# Altium PCB AGC_Calib_Board.PcbDoc (part 1 of 2)
Units mil, origin at the board's own origin, x right, y up, seen from the top; angles counter-clockwise.
Board outline 3200 x 2800 mil, 6 copper layers (Top Layer, InternalPlane1, MidLayer1, MidLayer2, MidLayer3, Bottom Layer), stack 62.3 mil thick; 76 components, 86 nets, 398 pads, 234 vias.
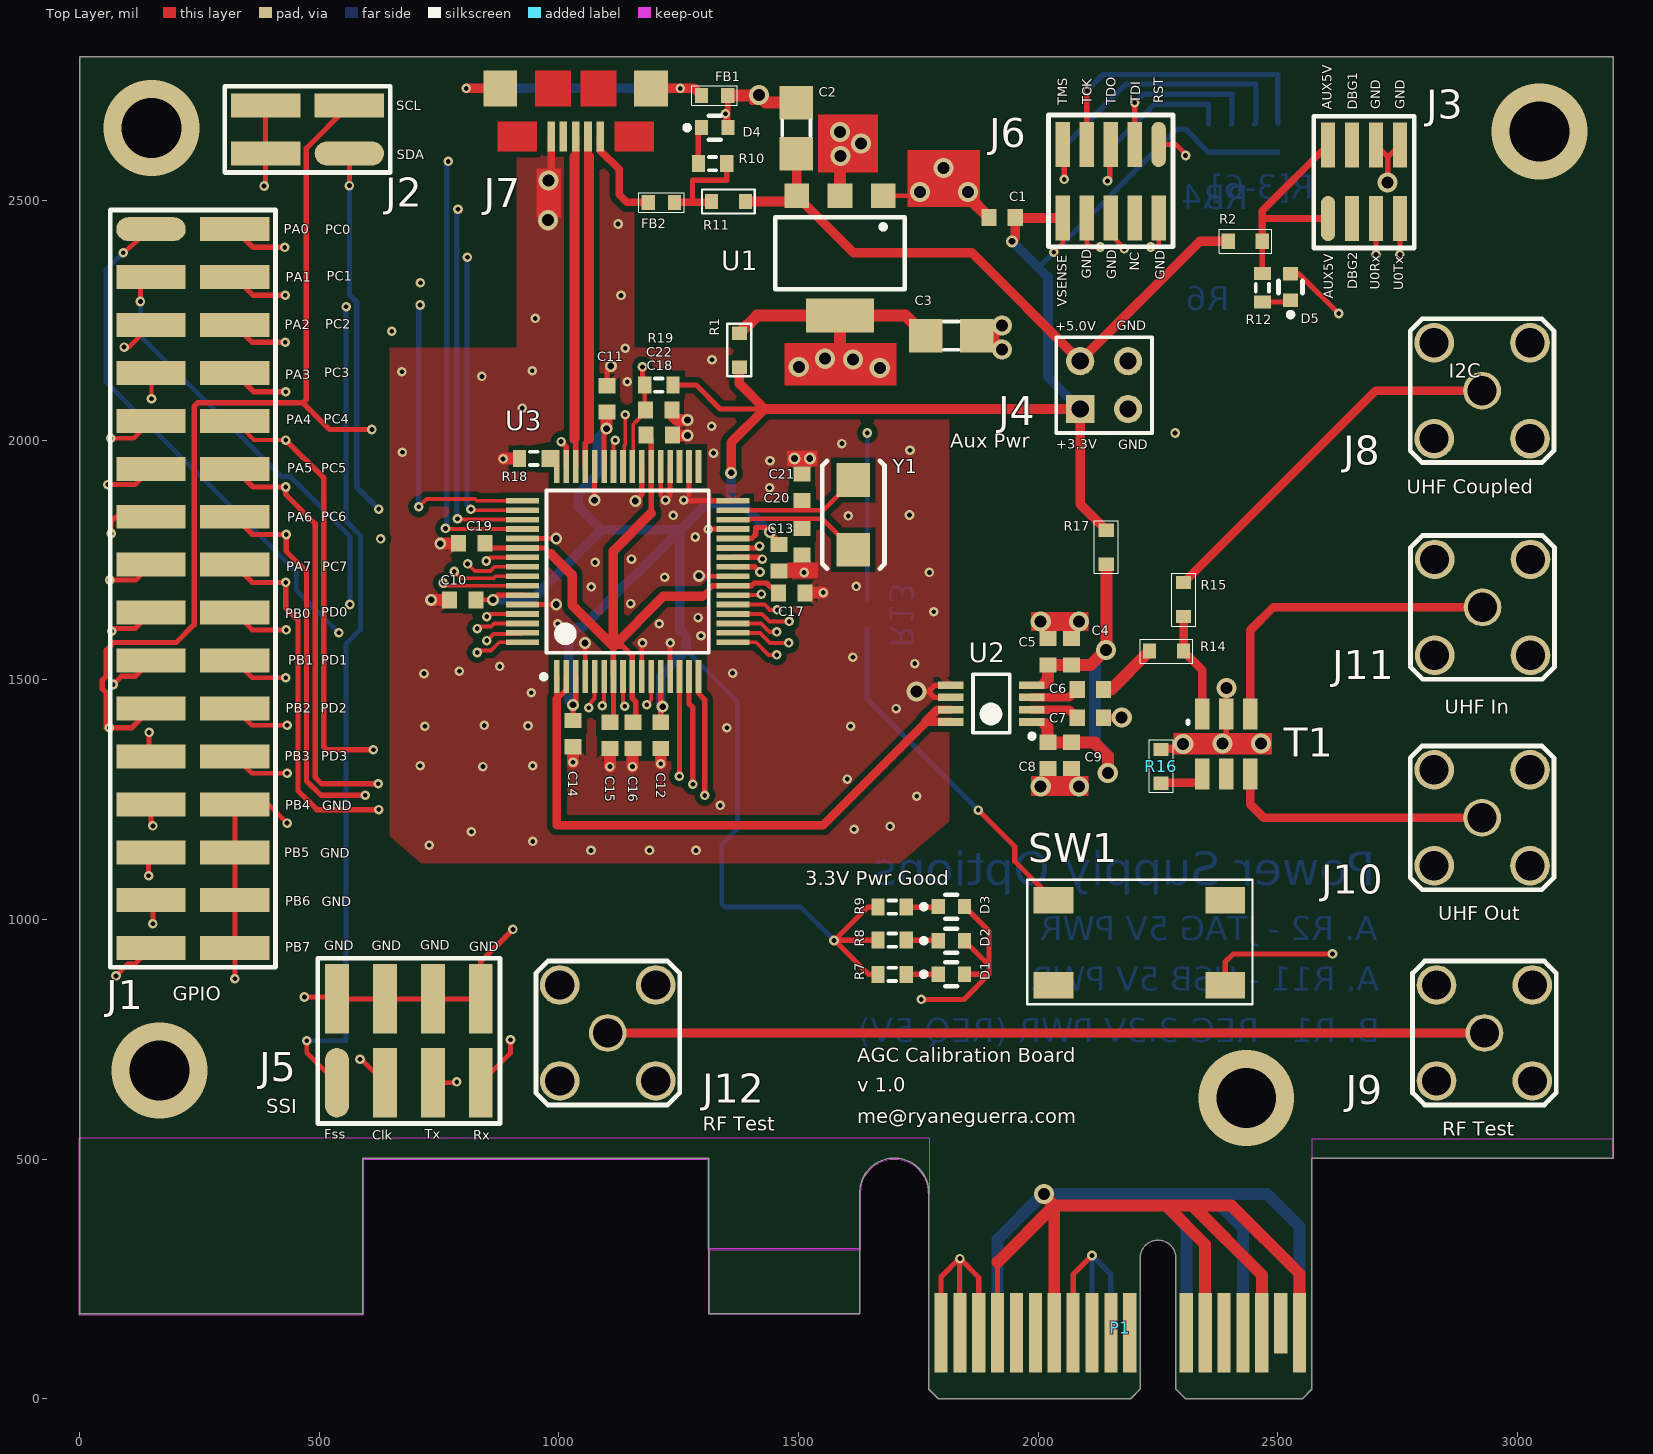
[diagram p0: Top Layer view]
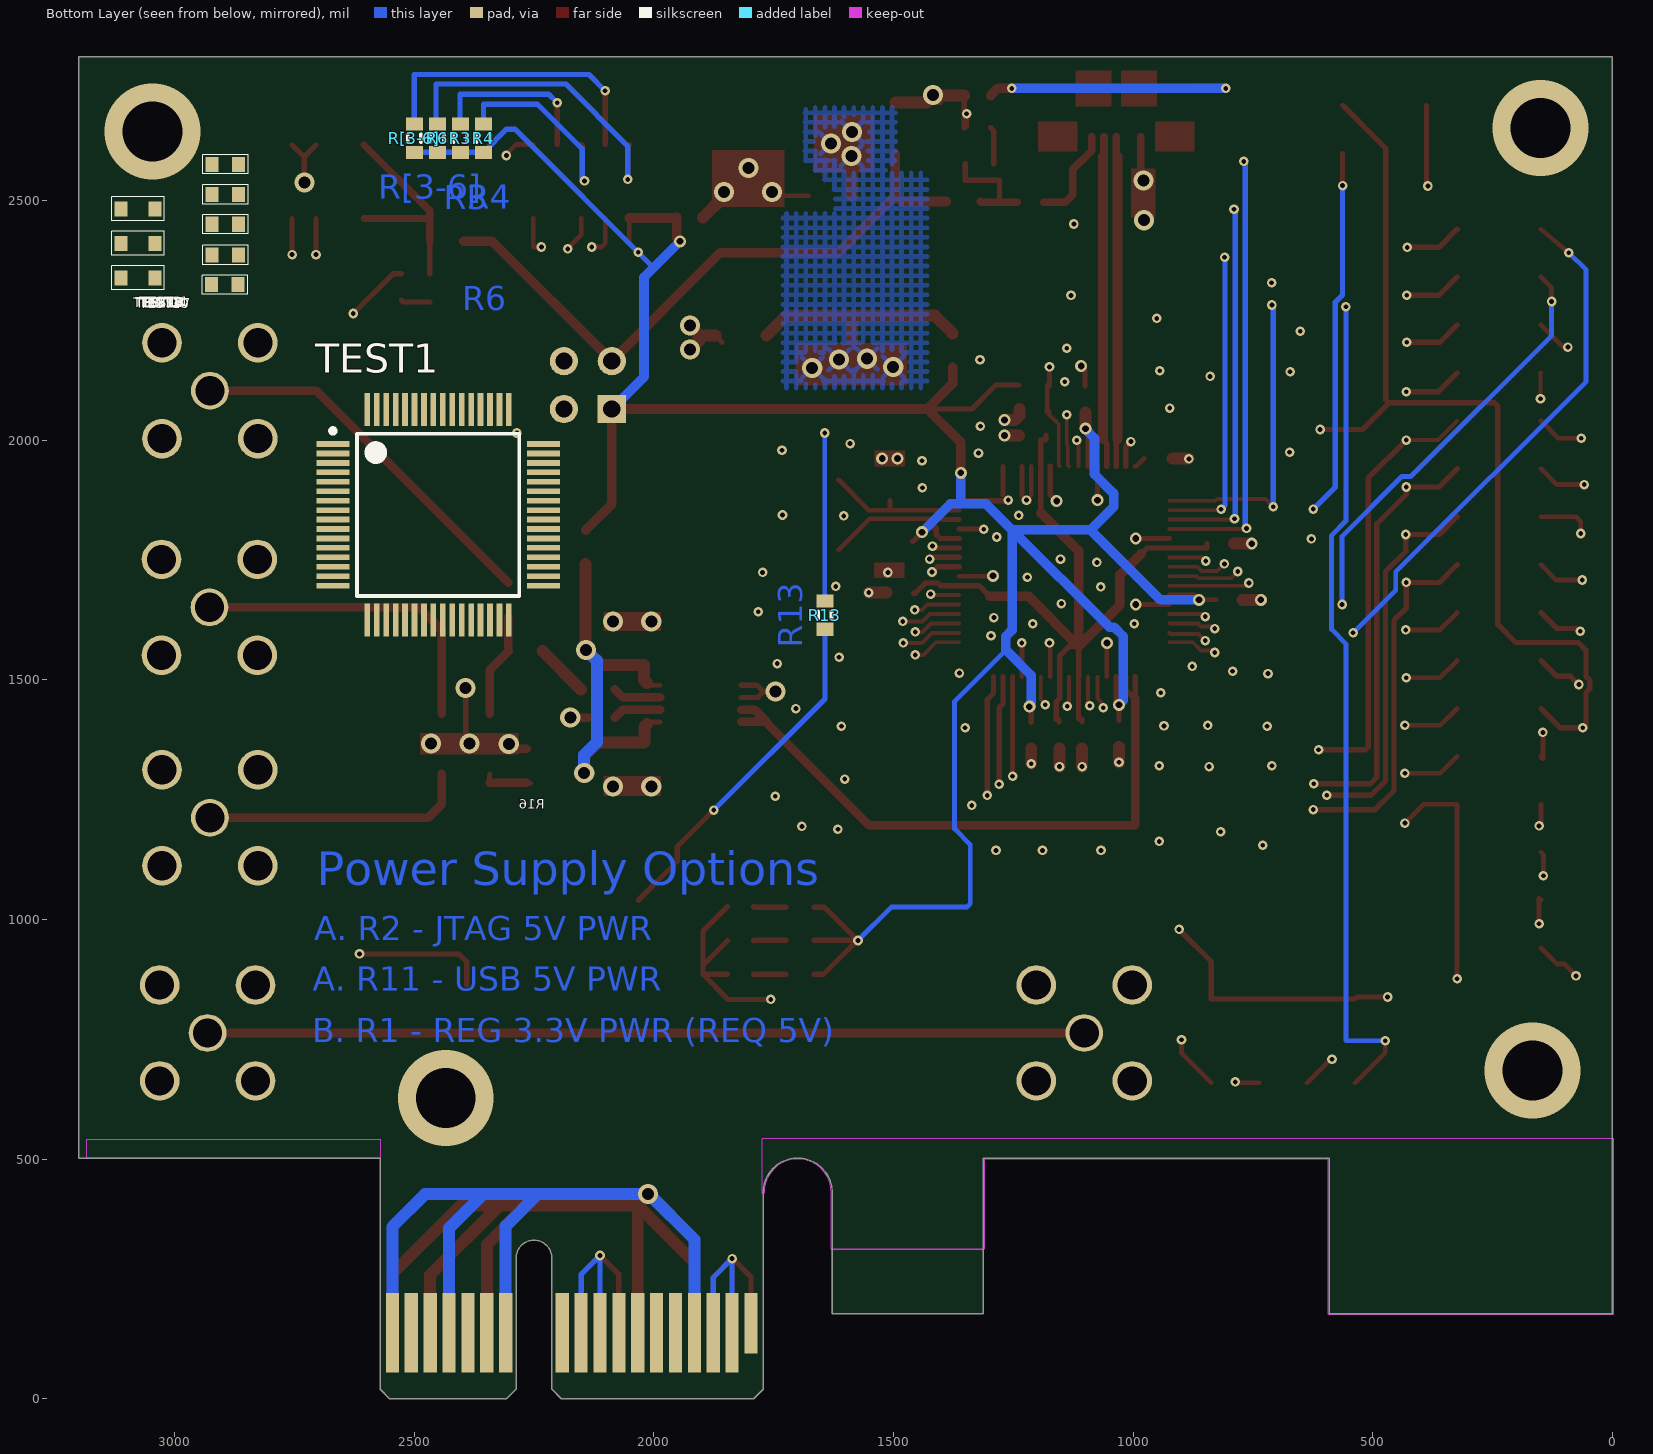
[diagram p1: Bottom Layer view, seen from below]
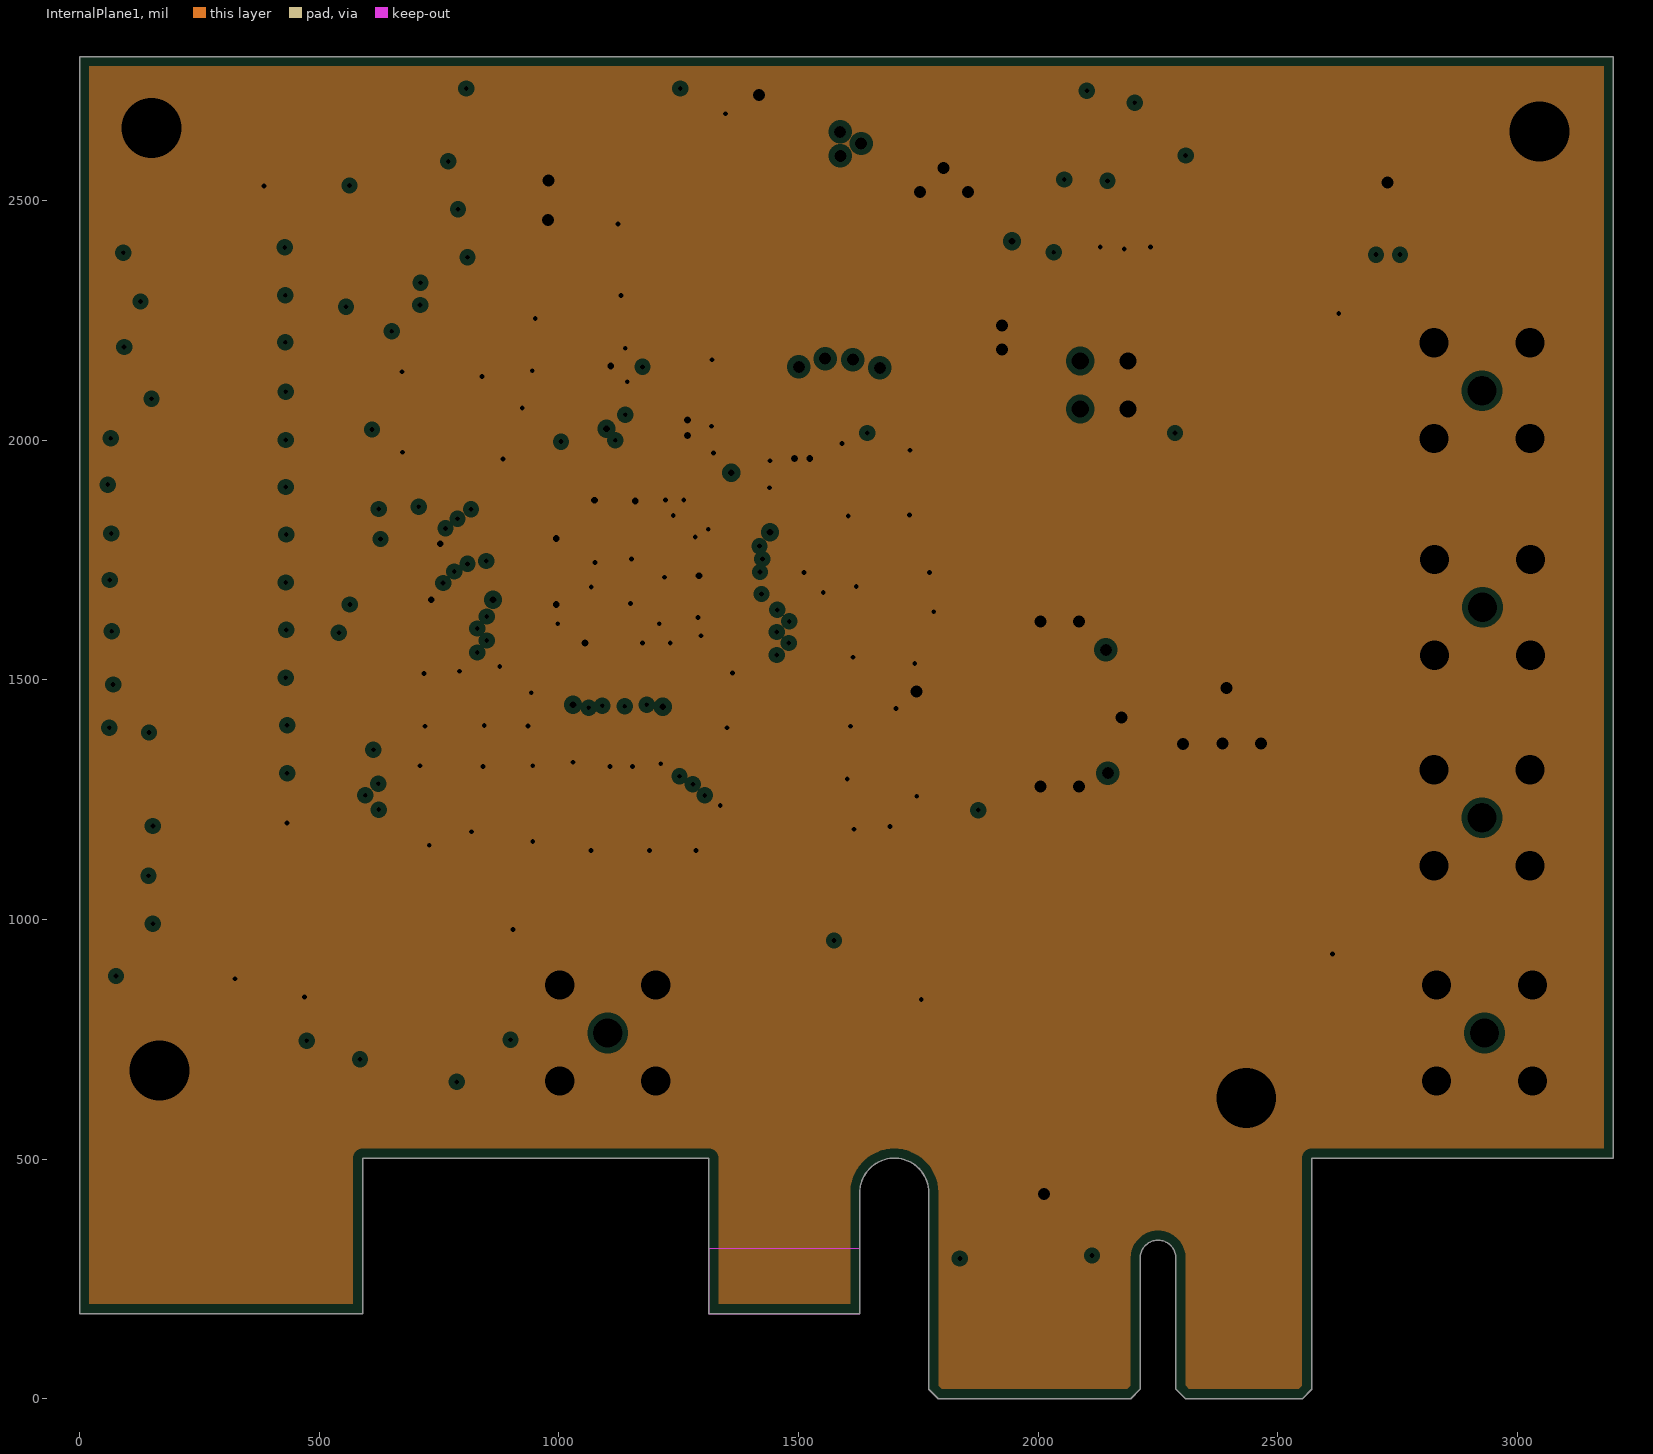
[diagram p2: InternalPlane1, clearances drawn from the general rule]
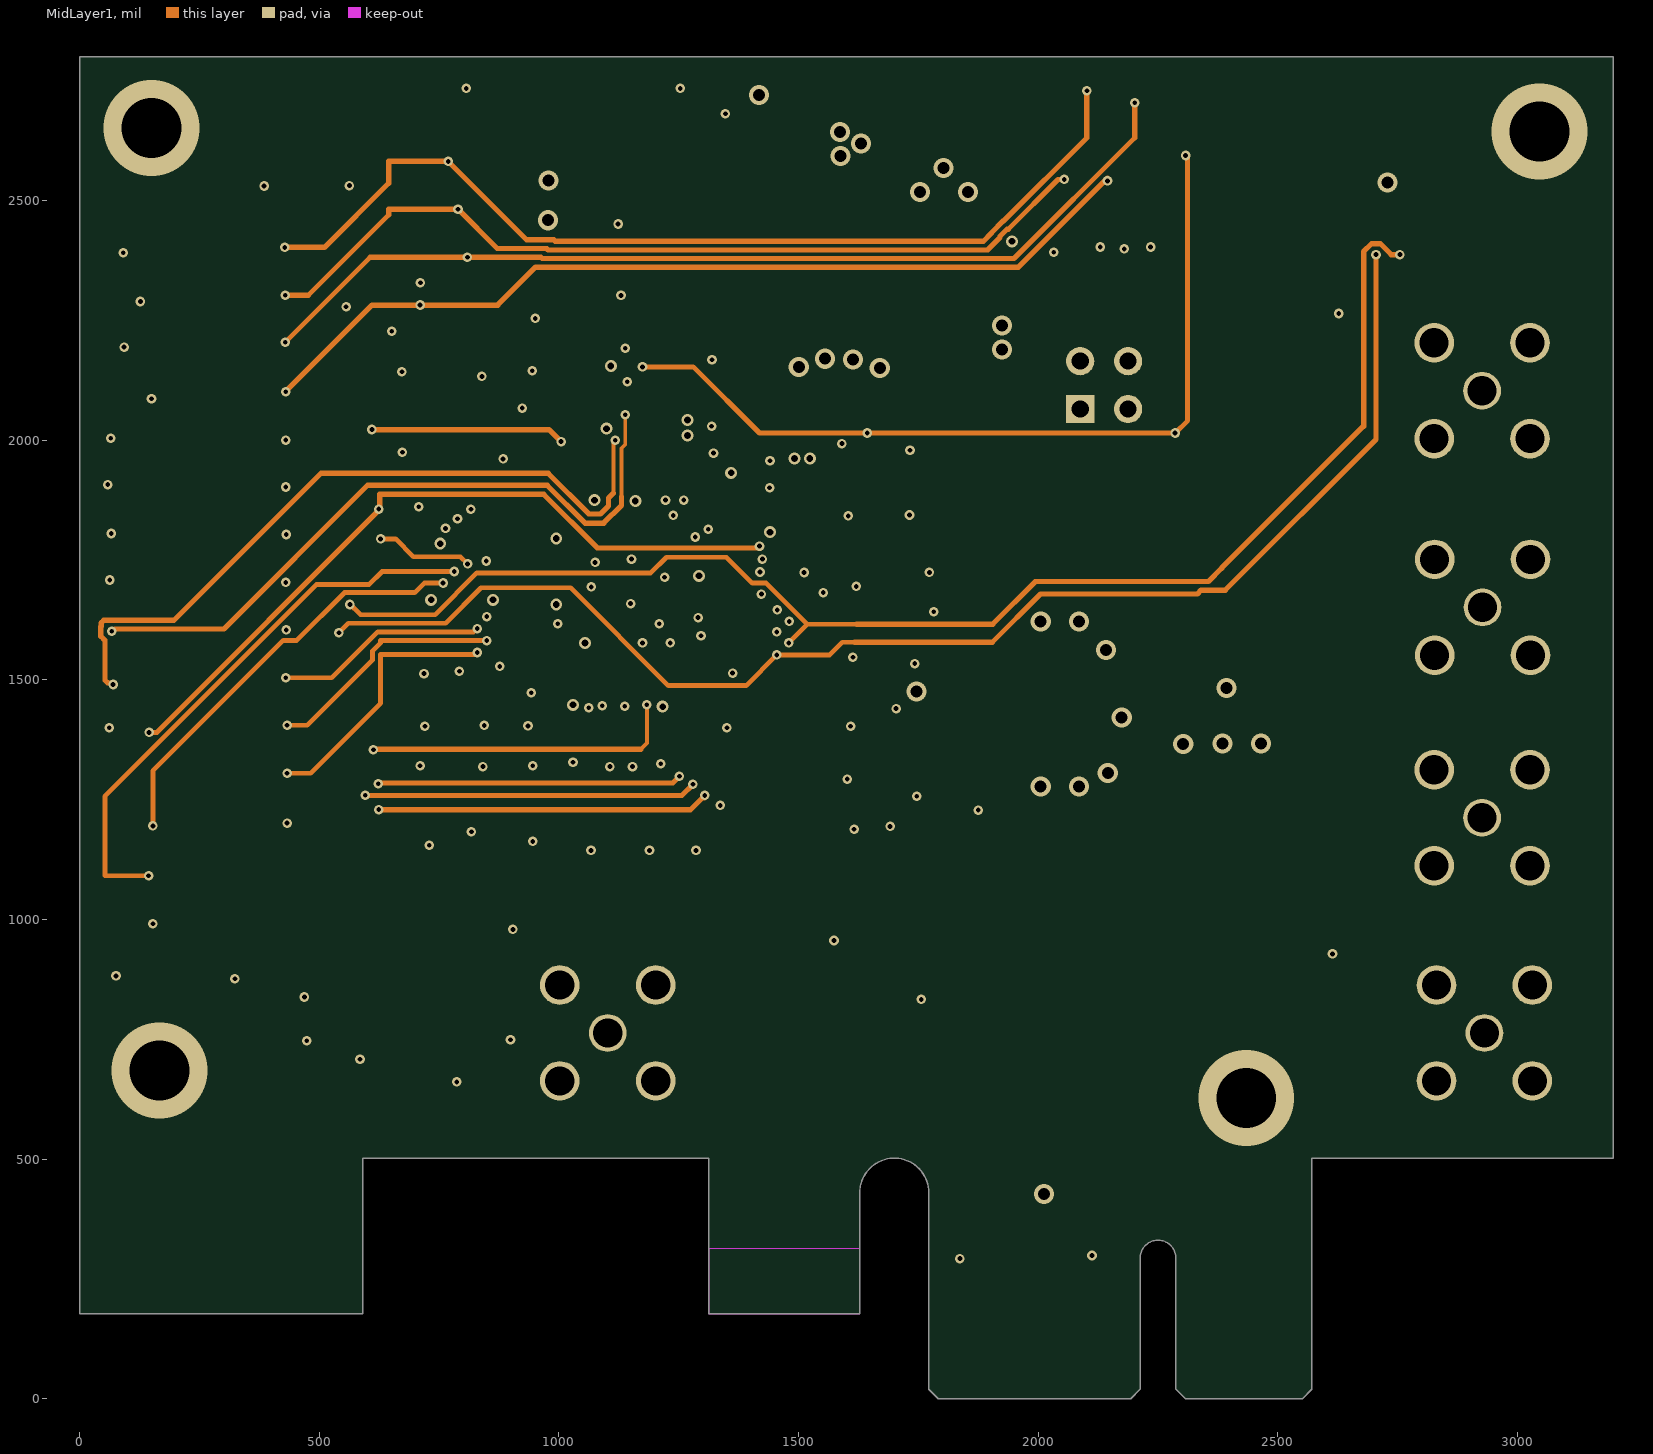
[diagram p3: MidLayer1]
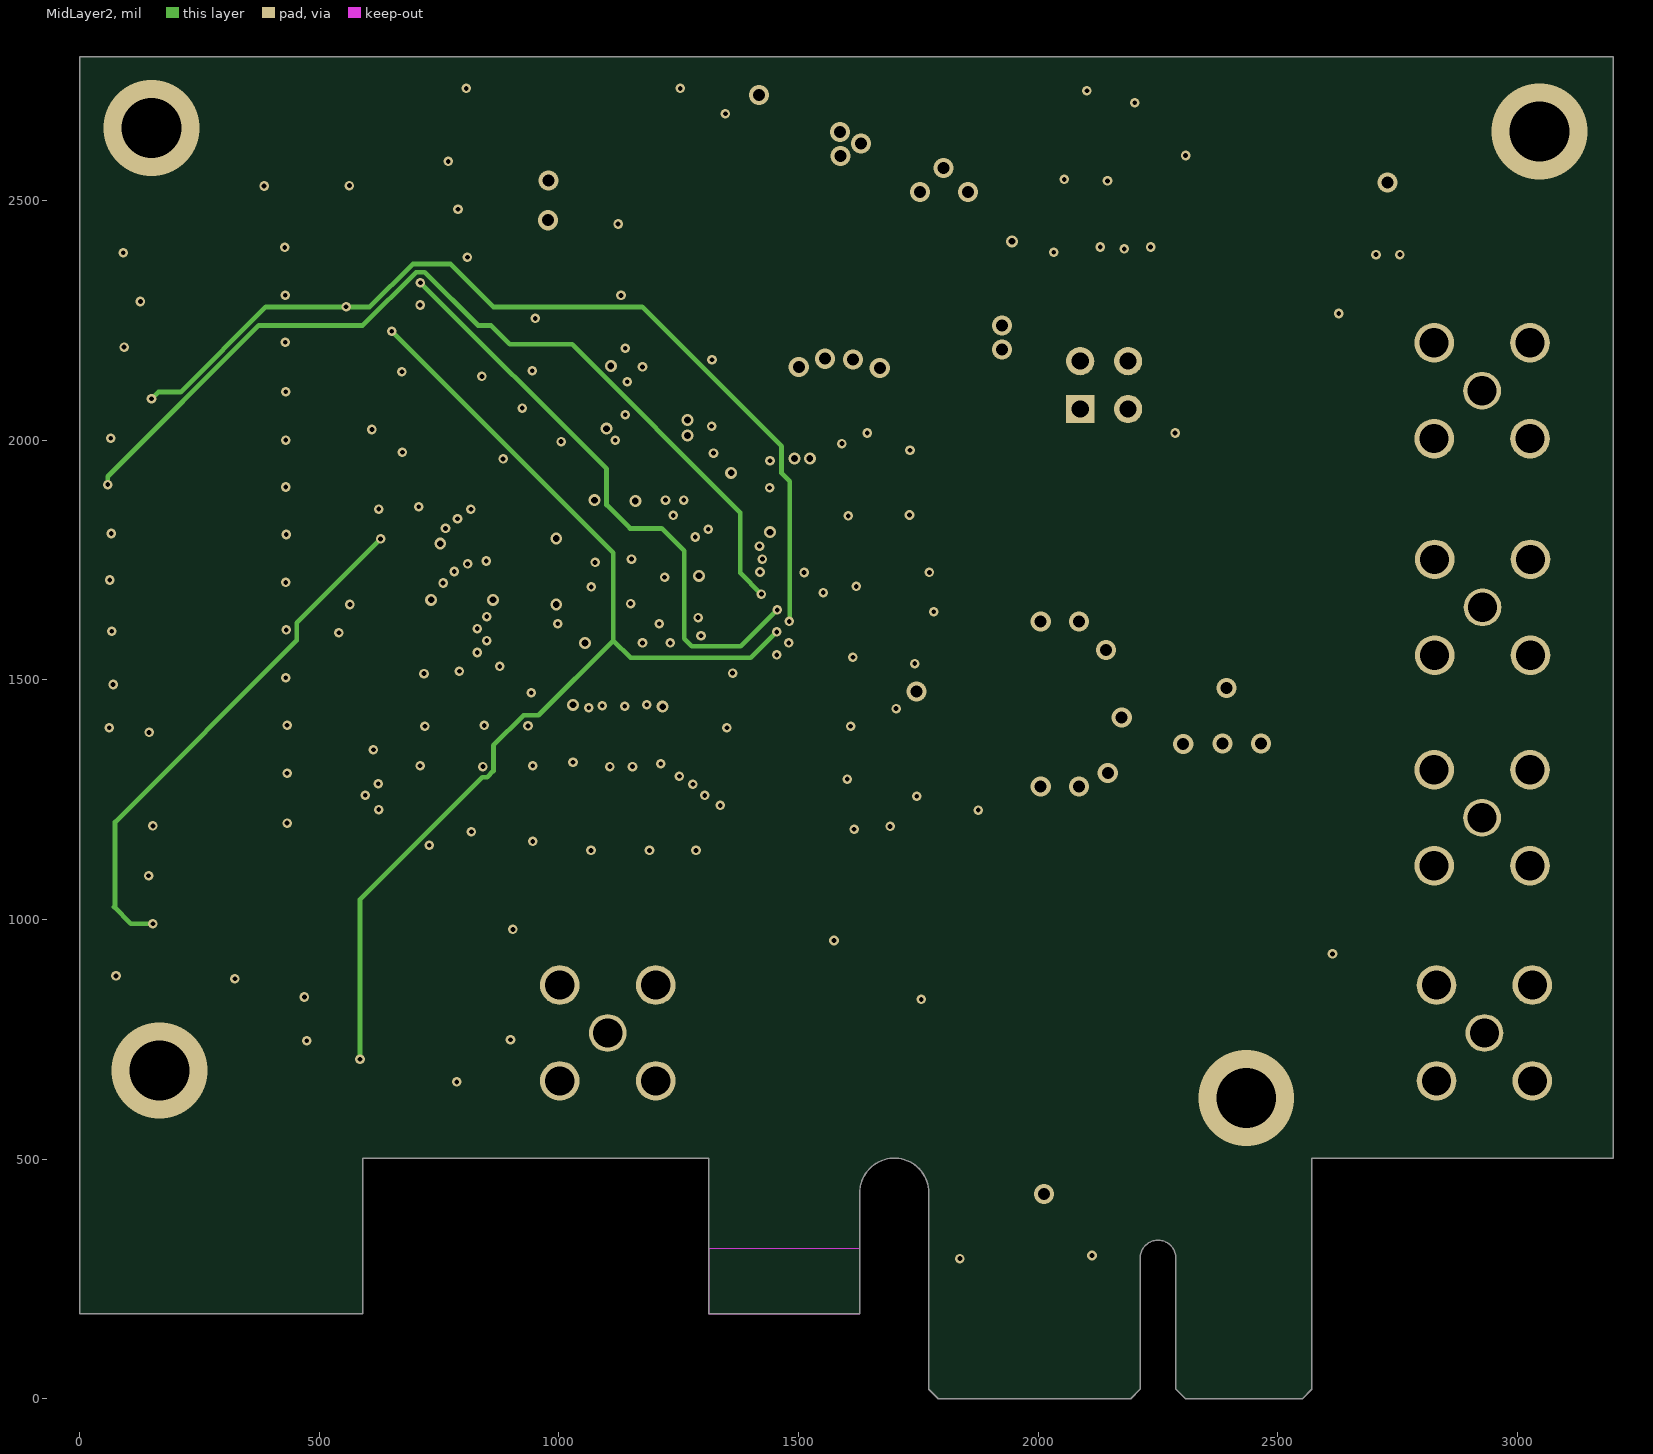
[diagram p4: MidLayer2]
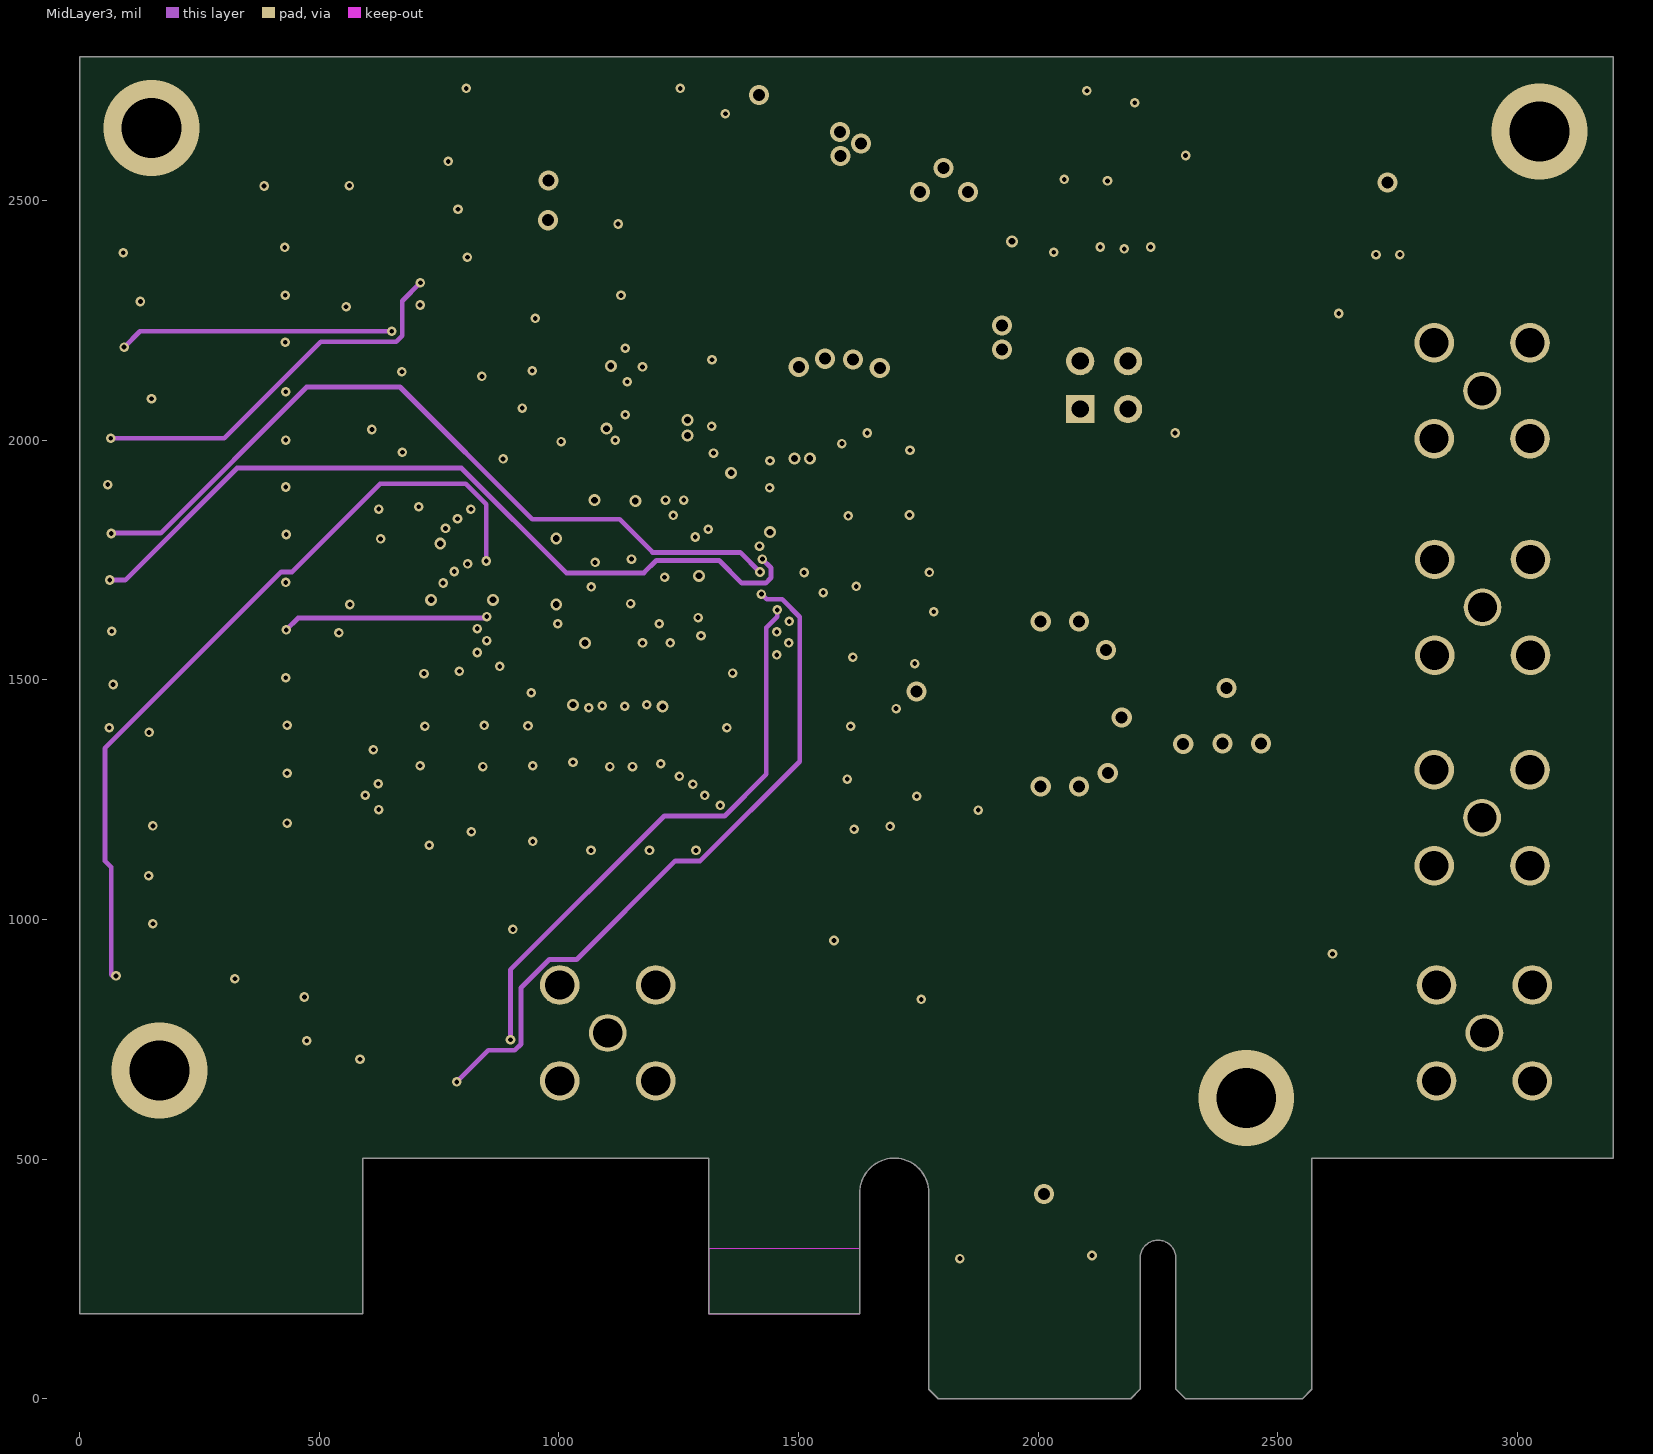
[diagram p5: MidLayer3]

## Layer stack, top to bottom
TopSolder: solder mask 0.4, Solder Resist, Dk 4.5
Top Layer: signal copper 1.35
Dielectric1: core 9.7992, FR-4, Dk 4.25
InternalPlane1: plane copper 1.35
Dielectric5: prepreg 12.6, FR-4, Dk 4.8
MidLayer1: signal copper 1.35
Dielectric4: core 9.4016, FR-4, Dk 4.25
MidLayer2: signal copper 1.35
Dielectric3: prepreg 12.6, FR-4, Dk 4.8
MidLayer3: signal copper 1.35
Dielectric2: core 9.7992, FR-4, Dk 4.25
Bottom Layer: signal copper 1.35
BottomSolder: solder mask 0.4, Solder Resist, Dk 4.5

## Board outline
0,177.17 590.55,177.17 590.55,501.97 1312.99,501.97 1312.99,177.17 1627.95,177.17 1627.95,430.12 cw(c1699.8,430.12) 1771.65,430.12 1771.65,19.68 1791.34,0 2192.91,0 2212.6,19.68 2212.6,293.31 cw(c2250,293.31) 2287.4,293.31 2287.4,19.68 2307.09,0 2551.18,0 2570.87,19.68 2570.87,501.97 3200,502 3200,2800 0,2800

## Design rules (kind name [scope] priority, off if disabled: settings)
Clearance PolyClearance [InPolygon] p1: gap=12 ignorepadtopadclearanceinfootprint=FALSE except(0: Arc-Hole Track-Hole SMDPad-Hole THPad-Hole Via-Hole Fill-Hole Poly-Hole Region-Hole Text-Hole) // RYAN - increase poly separation DFM
Clearance [All] p2: gap=7 ignorepadtopadclearanceinfootprint=FALSE except(0: Arc-Hole Track-Hole SMDPad-Hole THPad-Hole Via-Hole Fill-Hole Poly-Hole Region-Hole Text-Hole)
DiffPairsRouting [All] p1: maxlimit=10 minlimit=10 mostfreqgap=10 toplayer_minwidth=15 toplayer_maxwidth=15 toplayer_prefwidth=15 midlayer1_minwidth=15 midlayer1_maxwidth=15 midlayer1_prefwidth=15 midlayer2_minwidth=15 midlayer2_maxwidth=15 midlayer2_prefwidth=15 midlayer3_minwidth=15 midlayer3_maxwidth=15 midlayer3_prefwidth=15 bottomlayer_minwidth=15 bottomlayer_maxwidth=15 bottomlayer_prefwidth=15 maxuncoupledlength=500
FabricationTestPointUsage TestPointUsage [All] p1: valid=0 allowmultiple=FALSE
FabricationTestpoint Testpoint [All] p1: side=3 testpointundercomponent=TRUE minsize=40 maxsize=100 preferedsize=60 minholesize=20 maxholesize=40 preferedholesize=32 testpointgrid=1 allowsidetop=TRUE allowsidebottom=TRUE usegrid=TRUE gridtolerance=0.01
Height "PCI Express, Page 84, \"Component Height Constraints\" for solder side" [OnBottomLayer] p1: minheight=0 maxheight=105.12 prefheight=105.12
Height "PCI Express, Page 84, \"Component Height Constraints\" for component side" [OnTopLayer] p2: minheight=0 maxheight=569.68 prefheight=569.68
HoleSize [All] p1: absolutevalues=TRUE maxlimit=100 minlimit=10 maxpercent=80.000 minpercent=20.000
MinimumAnnularRing MinAnnularRingVia [IsVia] p1: minimumring=5
MinimumAnnularRing MinAnnularRing [All] p2: minimumring=7 // Specify the Minimum Annular Ring Size
PlaneClearance PlaneClearance_Sunstone [All] p1: clearance=12
PlaneClearance [All] p2: clearance=20
PlaneConnect PlaneConnectVia [IsVia] p1: planeconnectstyle=Direct reliefexpansion=20 reliefentries=4 reliefconductorwidth=10 reliefairgap=10 // RYAN - No thermal relief for Vias (they overlap) DFM
PlaneConnect [All] p2: planeconnectstyle=Relief reliefexpansion=20 reliefentries=4 reliefconductorwidth=10 reliefairgap=10
PlaneConnect PlaneConnect_Sunstone [All] p3: planeconnectstyle=Relief reliefexpansion=10 reliefentries=4 reliefconductorwidth=8 reliefairgap=10
PolygonConnect PolygonGNDConnect [All vs InNet('GND') And IsVia] p1: connectstyle=Direct reliefconductorwidth=10 reliefentries=4 polygonreliefangle="90 Angle" airgapwidth=10
PolygonConnect [All] p2: connectstyle=Relief reliefconductorwidth=10 reliefentries=4 polygonreliefangle="45 Angle" airgapwidth=10
RoutingVias RoutingVias_Sunstone [All] p1: holewidth=16 width=30 viastyle="Through Hole" minholewidth=8 minwidth=24 maxholewidth=20 maxwidth=40
RoutingVias [All] p2: holewidth=10 width=20 viastyle="Through Hole" minholewidth=10 minwidth=20 maxholewidth=28 maxwidth=250
SMDNeckDown [All] p1: percent=100.000
SilkToSolderMaskClearance SilkscreenOverComponentPads [IsPad] p1: minsilkscreentomaskgap=10 clearancetoexposedcopper=TRUE
SolderMaskExpansion SolderMaskExpansion_Sunstone [All] p1: expansion=3
SolderMaskExpansion [All] p2: expansion=5
UnConnectedPin [All] p1:
ViasUnderSMD [All] p1: allowed=FALSE
Width [All] p1: maxlimit=100 minlimit=7 preferedwidth=10
22 further rules are at their usual default settings.

## Classes and differential pairs
net class PE[0..4]: PE0 PE1 PE3 PE4
net class PD[0..3]: PD0 PD1 PD2 PD3
net class PC[0..7]: PC0 PC1 PC2 PC3 PC4 PC5 PC6 PC7
net class PB[0..7]: PB0 PB1 PB2 PB3 PB4 PB5 PB6 PB7
net class PA[0..7]: PA0 PA1 PA2 PA3 PA4 PA5 PA6 PA7
component class U_Stellaris_LM3S5Y36: C10 C11 C12 C13 C14 C15 C16 C17 C18 C19 C20 C21 C22 R18 R19 U3 Y1
component class U_MAX2014: C4 C5 C6 C7 C8 C9 R17 U2
component class U_PCI_Express_X1_36Pin: P1
net class JTAG[1..5]: JTAG1 JTAG2 JTAG3 JTAG4 JTAG5
component class AGCCAL_Top_Level: C1 C2 C3 D1 D2 D3 D4 D5 FB1 FB2 J1 J2 J3 J4 J5 J6 J7 J8 J9 J10 J11 J12 R1 R2 R3 R4 R6 R7 R8 R9 R10 R11 R12 R13 R14 R15 R16 R[3-6] SW1 T1 U1
differential pair USB0D: +USB0D_P -USB0D_N
differential pair PET0: +PET0_P -PET0_N
differential pair PER0: +PER0_P -PER0_N

## Components (designator, comment, footprint, x,y, rotation, side; value= is the part's Value field where it differs from the comment)
C1 "Cap Semi" 1608[0603] 1924.51,2464.73 r0 top
C2 "Cap Semi" C1206 1495.51,2650.73 r270 top
C3 "Cap Semi" C1206 1818.51,2217.73 r180 top
C4 "Cap Semi" 1608[0603] 2069.68,1558.47 r270 top (schematic designator C3)
C5 "Cap Semi" 1608[0603] 2020.46,1558.47 r270 top (schematic designator C4)
C6 "Cap Semi" 1608[0603] 2109.05,1479.73 r0 top (schematic designator C1)
C7 "Cap Semi" 1608[0603] 2109.05,1420.68 r0 top (schematic designator C2)
C8 "Cap Semi" 1608[0603] 2020.46,1341.94 r90 top (schematic designator C5)
C9 "Cap Semi" 1608[0603] 2069.68,1341.94 r90 top (schematic designator C6)
C10 "Cap" 1608[0603] 799.51,1666.73 r0 top (schematic designator C16)
C11 "Cap" 1608[0603] 1100.51,2085.73 r270 top (schematic designator C17)
C12 "Cap" 1608[0603] 1212.51,1383.73 r90 top (schematic designator C18)
C13 "Cap" 1608[0603] 1459.51,1754.73 r90 top (schematic designator C19)
C14 "Cap" 1608[0603] 1029.51,1387.73 r90 top (schematic designator C10)
C15 "Cap" 1608[0603] 1106.51,1383.73 r90 top (schematic designator C11)
C16 "Cap" 1608[0603] 1154.51,1383.73 r90 top (schematic designator C15)
C17 "Cap" 1608[0603] 1485.51,1680.73 r180 top (schematic designator C14)
C18 "Cap" 1608[0603] 1209.51,2010.73 r180 top (schematic designator C13)
C19 "Cap" 1608[0603] 818.51,1784.73 r0 top (schematic designator C12)
C20 "Cap Semi" 1608[0603] 1507.51,1787.73 r270 top
C21 "Cap Semi" 1608[0603] 1507.51,1901.73 r270 top
C22 "Cap Semi" 1608[0603] 1208.51,2062.73 r180 top
D1 "LED" 0603_SMT_POLAR 1791.27,885.51 r0 top
D2 "LED" 0603_SMT_POLAR 1791.27,955.51 r0 top
D3 "LED" 0603_SMT_POLAR 1791.27,1026.51 r0 top
D4 "LED" 0603_SMT_POLAR 1297.51,2651.73 r0 top
D5 "LED" 0603_SMT_POLAR 2526.51,2291.73 r90 top
FB1 "25% tol, 500mA" 0603_SMT 1352.51,2718.73 r180 top
FB2 "25% tol, 3A" 0603_SMT 1241.51,2495.73 r180 top
J1 "GPIO" 2.54mm_16x2_HDR 324,2440 r270 top
J2 "I2C" 2.54mm_2x2_HDR 388,2598 r90 top
J3 "PWR/UART" 1.27mm_2x4_SMT_HDR 2604.71,2615.75 r0 top
J4 "PWR" HDR2X2 2087.51,2064.73 r0 top
J5 "SSI" 2.54mm_4x2_HDR 537,834 r0 top
J6 "JTAG/SWD" 1.27mm_2x5_SMT_HDR 2251.28,2463.27 r180 top
J7 "USB-MICRO-B-SMT" USB_MICROB_SMT_R2 1198.51,2601.73 r180 top
J8 "SMA RF COUPLED" SMA-JACK-THROUGH-MOLEX_5 2826,2203 r0 top
J9 "SMA RF TEST" SMA-JACK-THROUGH-MOLEX_5 2831,863 r0 top
J10 "SMA RF OUT" SMA-JACK-THROUGH-MOLEX_5 2826,1312 r0 top
J11 "SMA RF IN" SMA-JACK-THROUGH-MOLEX_5 2827,1751 r0 top
J12 "SMA RF TEST" SMA-JACK-THROUGH-MOLEX_5 1002,863 r0 top
P1 "PCIeX1-GF-2D-1000-1K-O36" PCIeX1-GF-2D-1000-1K-O36 2171.26,137.8 r0 top locked
R1 "" 0805_SMT 1376.51,2222.73 r270 top
R2 "Res3" 0805_SMT 2467.51,2414.73 r180 top
R3 "Res3" J1-0603 2403.51,2629.73 r90 bottom
R4 "Res3" J1-0603 2355.51,2629.73 r90 bottom
R6 "Res3" J1-0603 2451.51,2629.73 r90 bottom
R7 "Res3" J1-0603 1695.27,885.51 r180 top
R8 "Res3" J1-0603 1695.27,956.51 r180 top
R9 "Res3" J1-0603 1695.27,1025.51 r180 top
R10 "Res3" J1-0603 1320.51,2576.73 r0 top
R11 "" 0805_SMT 1318.51,2497.73 r0 top
R12 "Res3" J1-0603 2467.51,2317.73 r90 top
R13 "" J1-0603 1643,1635 r270 bottom
R14 "Res3" 0805_SMT 2302.87,1559.57 r180 top
R15 "Res3" 0805_SMT 2303.51,1631.73 r90 top
R16 "Res3" 0805_SMT 2256.51,1354.73 r270 top
R17 "Res3" 0805_SMT 2142,1812 r270 top (schematic designator R4)
R18 "1% tol" J1-0603 947.51,1961.73 r0 top (schematic designator R7)
R19 "1% tol" J1-0603 1208.51,2114.73 r0 top (schematic designator R6)
R[3-6] "Res3" J1-0603 2499.51,2629.73 r90 bottom (schematic designator R5)
SW1 "PB_SW" PUSHBUTTON_SW2_SMT 2032,863 r90 top
T1 "TCD-20-4+" DB714-MINICIRCUITS 2342.24,1303.66 r90 top
TEST1 "Comment" PQFP-64-TI_Stellaris 2450,1844 r180 bottom
TEST7 "Comment" 0603_SMT 2921.49,2575.27 r180 bottom
TEST8 "Comment" 0603_SMT 2921.49,2512.27 r180 bottom
TEST9 "Comment" 0603_SMT 2921.49,2450.27 r180 bottom
TEST10 "Comment" 0603_SMT 2921.49,2386.27 r180 bottom
TEST11 "Comment" 0603_SMT 2922.49,2324.27 r180 bottom
TEST12 "Comment" 0805_SMT 3111.35,2482.27 r180 bottom
TEST13 "Comment" 0805_SMT 3111.35,2410.27 r180 bottom
TEST14 "Comment" 0805_SMT 3111.35,2338.27 r180 bottom
U1 "NX1117CE33Z" NX1117CE33Z-SOT223 1586.51,2259.73 r180 top
U2 "MAX2014" uMAX-8 1902.35,1450.21 r180 top
U3 "LM3S5Y36" PQFP-64-TI_Stellaris 1143.51,1725.73 r90 top (schematic designator U1)
Y1 "7A-16.000MAAJ-T" XTAL_SMT_5_3-2 1614.51,1916.73 r270 top

## Footprints (in the part's own frame and the unit in brackets; to place one, negate y for a bottom-side part, rotate by r counter-clockwise, add the part's x,y. Pads: shape width x height; smd on the part's side, far side on the other; paste and mask are expansions set on the pad)
1.27mm_2x4_SMT_HDR [mm] "2x4 SMT Pin Header, 1.27mm Pitch"
  oval 0.76x2.4 smd: 1(0,-3.9)
  rect 0.76x2.4 smd: 2(1.27,-3.9) 3(2.54,-3.9) 4(3.81,-3.9) 5(0,0) 6(1.27,0) 7(2.54,0) 8(3.81,0)
  silkscreen extent -0.76,-5.46 4.57,1.52
1.27mm_2x5_SMT_HDR [mm] "2x5 SMT Pin Header, 1.27mm Pitch"
  oval 0.76x2.4 smd: 1(0,-3.9)
  rect 0.76x2.4 smd: 2(1.27,-3.9) 3(2.54,-3.9) 4(3.81,-3.9) 5(5.08,-3.9) 6(0,0) 7(1.27,0) 8(2.54,0) 9(3.81,0) 10(5.08,0)
  silkscreen extent -0.76,-5.46 5.84,1.52
2.54mm_2x2_HDR [mm] "2x2 SMT Pin Header, 2.54mm Pitch"
  oval 1.27x3.68 smd: 1(0,-4.445)
  rect 1.27x3.68 smd: 2(2.54,-4.445) 3(0,0) 4(2.54,0)
  silkscreen extent -1.02,-6.6 3.56,2.16
2.54mm_4x2_HDR [mm] "4x2 SMT Pin Header, 2.54mm Pitch"
  oval 1.27x3.68 smd: 1(0,-4.445)
  rect 1.27x3.68 smd: 2(2.54,-4.445) 3(5.08,-4.445) 4(7.62,-4.445) 5(0,0) 6(2.54,0) 7(5.08,0) 8(7.62,0)
  silkscreen extent -1.02,-6.6 8.64,2.16
2.54mm_16x2_HDR [mm] "16x2 SMT Pin Header, 2.54mm Pitch"
  oval 1.27x3.68 smd: 1(0,-4.445)
  rect 1.27x3.68 smd: 2(2.54,-4.445) 3(5.08,-4.445) 4(7.62,-4.445) 5(10.16,-4.445) 6(12.7,-4.445) 7(15.24,-4.445) 8(17.78,-4.445) 9(20.32,-4.445) 10(22.86,-4.445) 11(25.4,-4.445) 12(27.94,-4.445) 13(30.48,-4.445) 14(33.02,-4.445) 15(35.56,-4.445) 16(38.1,-4.445) 17(0,0) 18(2.54,0) 19(5.08,0) 20(7.62,0) 21(10.16,0) 22(12.7,0) 23(15.24,0) 24(17.78,0) 25(20.32,0) 26(22.86,0) 27(25.4,0) 28(27.94,0) 29(30.48,0) 30(33.02,0) 31(35.56,0) 32(38.1,0)
  silkscreen extent -1.02,-6.6 39.12,2.16
0603_SMT [mm] "0603 Chip Cap, Res, Ind"
  rect 0.7x0.8 smd: 1(0,0) 2(1.4,0)
  silkscreen extent -0.51,-0.51 1.9,0.51
0603_SMT_POLAR [mm] "0603 Chip LED w/ Polarity"
  rect 0.7x0.8 smd: +(0,0) -(1.4,0)
  silkscreen extent -0.89,-0.63 1.02,0.64
0805_SMT [mm] "0805 Chip Cap, Res, Ind"
  rect 0.7x0.8 smd: 1(0,0) 2(1.8,0)
  silkscreen extent -0.51,-0.63 2.29,0.64
1608[0603] [mm] "Chip Capacitor, Body 1.6x0.8mm, IPC High Density"
  rect 0.8x0.9 smd: 1(-0.7,0) 2(0.7,0)
  body extent -0.87,-0.48 0.87,0.48, height 1.3
C1206 [mil] "Chip Capacitor, Body 3.2x1.6mm, IPC High Density"
  rect 70x70 smd: 1(-53.15,0) 2(53.15,0)
  silkscreen extent -16,-30 16,30, body extent -67,-35 67,35, height 51
DB714-MINICIRCUITS [mm] "DB714 Footprint for Mini-Circuits Directional Couplers"
  rect 1.65x0.76 smd: 1(3.18,0) 2(3.18,-1.27) 3(3.18,-2.54) 4(0,-2.54) 5(0,-1.27) 6(0,0)
  silkscreen extent 2.67,0.76 2.79,0.76
HDR2X2 [mm] "Connector; Header; 2x2 Position"
  rect 1.5x1.5 hole 0.914: 1(0,0)
  round 1.5 hole 0.914: 2(0,2.54) 3(2.54,0) 4(2.54,2.54)
  silkscreen extent -1.27,-1.27 3.81,3.81
J1-0603 [mm] "Chip Resistor, Body 1.6x0.8mm, IPC High Density"
  rect 0.7x0.9 smd: 1(-0.75,0) 2(0.75,0)
  silkscreen extent -0.2,-0.35 0.2,0.35, body extent -0.85,-0.48 0.85,0.48, height 0.9
NX1117CE33Z-SOT223 [mm] "NX1117CE33Z, SOT223 pkg, 6.7 x 7.3 x 1.8 mm"
  rect 1.3x1.3 smd: 1(-2.3,-6.35) 2(0,-6.35) 3(2.3,-6.35)
  rect 3.6x1.8 smd: 4(0,0)
  silkscreen extent -3.43,-5.21 3.43,-1.4
PCIeX1-GF-2D-1000-1K-O36 [mm] "Golden finger, PCIeX1, Dual, Opposite, Pitch 1mm, 36-Position"
  rect 0.7x3.2 smd far side paste-1: A1(-9.5,0.5)
  rect 0.7x4.2 smd far side paste-1: A2(-8.5,0) A3(-7.5,0) A4(-6.5,0) A5(-5.5,0) A6(-4.5,0) A7(-3.5,0) A8(-2.5,0) A9(-1.5,0) A10(-0.5,0) A11(0.5,0) A12(3.5,0) A13(4.5,0) A14(5.5,0) A15(6.5,0) A16(7.5,0) A17(8.5,0) A18(9.5,0)
  rect 0.7x4.2 smd paste-1: B1(-9.5,0) B2(-8.5,0) B3(-7.5,0) B4(-6.5,0) B5(-5.5,0) B6(-4.5,0) B7(-3.5,0) B8(-2.5,0) B9(-1.5,0) B10(-0.5,0) B11(0.5,0) B12(3.5,0) B13(4.5,0) B14(5.5,0) B15(6.5,0) B16(7.5,0) B18(9.5,0)
  rect 0.7x3.2 smd paste-1: B17(8.5,0.5)
PQFP-64-TI_Stellaris [mm] "TSQFP, 64-Leads, Body 12.2x12.2mm (max), Pitch 0.50mm, IPC Medium Density"
  rect 1.75x0.3 smd: 1(-5.575,3.75) 2(-5.575,3.25) 3(-5.575,2.75) 4(-5.575,2.25) 5(-5.575,1.75) 6(-5.575,1.25) 7(-5.575,0.75) 8(-5.575,0.25) 9(-5.575,-0.25) 10(-5.575,-0.75) 11(-5.575,-1.25) 12(-5.575,-1.75) 13(-5.575,-2.25) 14(-5.575,-2.75) 15(-5.575,-3.25) 16(-5.575,-3.75) 33(5.575,-3.75) 34(5.575,-3.25) 35(5.575,-2.75) 36(5.575,-2.25) 37(5.575,-1.75) 38(5.575,-1.25) 39(5.575,-0.75) 40(5.575,-0.25) 41(5.575,0.25) 42(5.575,0.75) 43(5.575,1.25) 44(5.575,1.75) 45(5.575,2.25) 46(5.575,2.75) 47(5.575,3.25) 48(5.575,3.75)
  rect 0.3x1.75 smd: 17(-3.75,-5.575) 18(-3.25,-5.575) 19(-2.75,-5.575) 20(-2.25,-5.575) 21(-1.75,-5.575) 22(-1.25,-5.575) 23(-0.75,-5.575) 24(-0.25,-5.575) 25(0.25,-5.575) 26(0.75,-5.575) 27(1.25,-5.575) 28(1.75,-5.575) 29(2.25,-5.575) 30(2.75,-5.575) 31(3.25,-5.575) 32(3.75,-5.575) 49(3.75,5.575) 50(3.25,5.575) 51(2.75,5.575) 52(2.25,5.575) 53(1.75,5.575) 54(1.25,5.575) 55(0.75,5.575) 56(0.25,5.575) 57(-0.25,5.575) 58(-0.75,5.575) 59(-1.25,5.575) 60(-1.75,5.575) 61(-2.25,5.575) 62(-2.75,5.575) 63(-3.25,5.575) 64(-3.75,5.575)
  silkscreen extent -5.7,-4.3 4.3,4.57, body extent -5,-5 5,5, height 1.6
PUSHBUTTON_SW2_SMT [mm] "SMT Pushbutton Switch, Mouser 506-1571563-9"
  rect 1.4x2.1 smd: 1(4.5,0) 2(4.5,-9.1) 3(0,0) 4(0,-9.1)
  silkscreen extent -1.02,-10.54 5.59,1.4
SMA-JACK-THROUGH-MOLEX_5 [mm] "SMA Female Jack Through-Mount PCB Connector"
  round 2.1 hole 1.549: 1(0,-5.08) 1(0,0) 1(5.08,-5.08) 1(5.08,0)
  round 2 hole 1.549: 2(2.54,-2.54)
  silkscreen extent -1.27,-6.35 6.35,1.27
uMAX-8 [mm] "uMAX from Maxim, 8-Leads, Body 3.1x3.1mm (max), Pitch 0.65mm, IPC Medium Density, TSOP-like"
  rect 1.35x0.4 smd: 1(-2.15,0.975) 2(-2.15,0.325) 3(-2.15,-0.325) 4(-2.15,-0.975) 5(2.15,-0.975) 6(2.15,-0.325) 7(2.15,0.325) 8(2.15,0.975)
  silkscreen extent -2.28,-1.55 0.98,1.85, body extent -1.55,-1.55 1.55,1.55, height 1.1
USB_MICROB_SMT_R2 [mm] "USB Micro B, Standard (bottom mount), Shell SMT, Hirose"
  rect 0.4x1.6 smd: 1(2.85,-0.8) 2(3.5,-0.8) 3(4.15,-0.8) 4(4.8,-0.8) 5(5.45,-0.8)
  rect 1.8x1.9 smd: G1(0.15,-3.35) G2(8.15,-3.35)
  Top Layer region: 4.4,-4.3 6.3,-4.3 6.3,-2.4 4.4,-2.4
  Top Layer region: 2,-4.3 3.9,-4.3 3.9,-2.4 2,-2.4
  Top Layer region: 6.2,-1.6 8.3,-1.6 8.3,0 6.2,0
  Top Layer region: 0,-1.6 2.1,-1.6 2.1,0 0,0
XTAL_SMT_5_3-2 [mil] "7A Crystal, 5 x 3.2mm body, 1.7 x 2.4mm pads"
  rect 70x70 smd: 1(0,0) 2(145.67,0)
  silkscreen extent -40,-65 185,65

## Part data
C1 C2 C3 C4 C5 C6 C7 C8 C9 C20 C21 C22: "Capacitor (Semiconductor SIM Model)"
C10 C11 C12 C13 C14 C15 C16 C17 C18 C19: library part "Cap Semi", "Capacitor (Semiconductor SIM Model)"
FB1 FB2: library part Inductor, "Inductor"
J1: library part "Header 16X2A", "Header, 16-Pin, Dual row"
J2 J4: library part "Header 2X2", "Header, 2-Pin, Dual row"
J3 J5: library part "Header 4X2A", "Header, 4-Pin, Dual row"
J6: library part "Header 5X2A", "Header, 5-Pin, Dual row"
J8: library part SMA-THROUGH-MOUNT, "RF Coupled"
J9 J10 J11 J12: library part SMA-THROUGH-MOUNT
P1: library part CMP-0001-00030-2, "Golden finger, PCIeX1, Dual, Opposite, Pitch 1mm, 36-Position"
R1 R11 R13 R18 R19: library part Res3, "Resistor"
R2 R3 R4 R6 R7 R8 R9 R10 R12 R14 R15 R16 R17 R[3-6]: "Resistor"
SW1: library part SMT-PUSHBUTTON-SW, "Pushbutton Switch"
U3: "TI Stellaris LM3S5Y36 Microcontroller"
Y1: library part XTAL, "Crystal Oscillator"

## Via types
v1: diameter 20, hole 10, Top Layer to Bottom Layer, tented top, 130 vias
v2: diameter 20, hole 10, Top Layer to Bottom Layer, 48 vias
v3: diameter 42, hole 25, Top Layer to Bottom Layer, 29 vias
v4: diameter 25, hole 14, Top Layer to Bottom Layer, 19 vias
v5: diameter 200, hole 125, Top Layer to Bottom Layer, 4 vias
v6: diameter 20, hole 10, Top Layer to Bottom Layer, tented both sides, 3 vias
v7: diameter 25, hole 14, Top Layer to Bottom Layer, tented top, 1 vias

## Nets (pads, with @x,y where several pads share a name; then routed paths per layer and width w, separated by ;. In a path a pad name is that pad's centre, name@x,y a point inside that pad or via, vN(x,y) a via of type N, cw(c..) or ccw(c..) an arc to the next point about the centre after c; other vN are vias at no path point)
3.3VAUX: P1.B10
5V_USB_1: FB2.1 R10.2 R11.1 | length 267.1
  Top Layer w10: FB2.1@1241.51,2495.73 1260.5,2495.73 1278.5,2495.72 1278.98,2496.2
  Top Layer w11: 1278.98,2496.2 1278.98,2542.2 1350.04,2542.2 R10.2@1350.04,2576.73
  Top Layer w15.75: FB2.1@1241.51,2495.73 1316.51,2495.73 R11.1@1318.51,2497.73
+3.3V: P1.A9 P1.A10 P1.B8 | length 515.6
  Top Layer w11: P1.B8@2072.83,137.8 2072.83,259.43 v1(2112.2,298.8)
  Bottom Layer w11: P1.A9@2112.2,137.8 v1(2112.2,298.8) 2151.57,259.43 P1.A10@2151.57,137.8
+12V: P1.A2 P1.A3 P1.B1 P1.B2 P1.B3 | length 823.1
  Top Layer w11: P1.B1@1797.24,137.8 1797.24,254.24 v1@1836,293 ; P1.B2@1836,138.41 v1@1836,293 ; P1.B3@1875.98,137.8 1875.98,253.02 v1(1836.61,292.39) v1@1836,293
  Bottom Layer w11: P1.A2@1836.61,137.8 v1(1836.61,292.39) 1875.98,253.02 P1.A3@1875.98,137.8
\RST_1: C22.2 J6.1 R13.1 R19.1 U3.40 | length 2404.4
  Top Layer w8: U3.40@1153.35,1945.22 1155.2,1947.07 1155.2,2033 1161.65,2039.45 1162.23,2039.45 1180.95,2058.17 C22.2@1180.95,2062.73
  Top Layer w10: v2(1174.51,2152.73) 1174.51,2114.26 1173.98,2113.73 R19.1@1174.95,2112.76 ; C22.2@1174.95,2058.73 1178.98,2062.76 R19.1@1178.98,2114.73 ; J6.1@2251.28,2616.81 2287.43,2616.81 2307.51,2596.73 v2(2307.51,2593.73)
  MidLayer1 w10: v2(1174.51,2152.73) 1280.51,2152.73 1418.51,2014.73 v2(1643.51,2014.73) v2(2285.51,2014.73) 2311.51,2040.73 2311.51,2589.73 v2(2307.51,2593.73)
  Bottom Layer w10: R13.1@1643.51,1665 v2(1643.51,2014.73)
CVDD_13_3: C15.2 C16.2 C17.2 C18.2 C19.2 U3.7 U3.9 U3.23 U3.38 U3.54 | length 1652
  Top Layer w10: C19.2@846.07,1784.73 846.07,1774.94 C19.2@855.86,1774.94 ; C15.2@1106.51,1411.29 1106.51,1418.76 C15.2@1113.98,1418.76 ; C16.2@1154.51,1411.29 1154.51,1416.84 C16.2@1160.06,1416.84 ; C18.2@1181.95,2010.73 1181.95,1999.96 C18.2@1192.72,1999.96
  Top Layer w11.1: C19.2@855.86,1774.94 U3.54@924.02,1774.94 971.3,1774.94 983.51,1762.73 ; U3.7@1113.51,1506.72 1113.51,1569.73 1133.51,1569.73 1153.35,1549.89 U3.9@1153.35,1506.24 1153.35,1460.78 1160.06,1454.07 C16.2@1160.06,1416.84 ; C15.2@1113.98,1418.76 U3.7@1113.98,1506.24 ; 1192.51,1847.73 1192.51,1945.01 U3.38@1192.72,1945.22 C18.2@1192.72,1999.96 ; 1298.51,1673.73 1301.51,1676.73 1320.98,1696.2 U3.23@1363,1696.2 1401.98,1696.2 1407.51,1701.73 1433.51,1701.73 1454.51,1680.73 C17.2@1457.95,1680.73
  Top Layer w20: 983.51,1762.73 1027.51,1718.73 1027.51,1655.73 1113.51,1569.73 ; 1192.51,1847.73 1113.51,1768.73 1113.51,1569.73 ; 1298.51,1673.73 1217.51,1673.73 1113.51,1569.73
DGB1_1: J3.6
DGB2_1: J3.2
GND: C1.1 C2.1 C3.1 C4.1 C5.1 C7.2 C8.1 C9.1 C10.1 C11.1 C12.1 C13.1 C14.1 C15.1 C16.1 C17.1 C18.1 C19.1 C20.2 C21.1 C22.1 D1.- D2.- D3.- D4.- D5.- FB1.1 J1.29 J1.30 J1.31 J1.32 J2.3 J2.4 J3.7 J3.8 J4.3 J4.4 J5.5 J5.6 J5.7 J5.8 J6.6 J6.8 J6.9 J7.5 J8.1 J9.1 J10.1 J11.1 J12.1 P1.A4 P1.A12 P1.A15 P1.A18 P1.B4 P1.B7 P1.B13 P1.B16 P1.B18 R16.1 R18.1 SW1.4 T1.2 U1.1 U2.5 U2.6 U3.4 U3.10 U3.13 U3.24 U3.29 U3.32 U3.34 U3.36 U3.37 U3.39 U3.44 U3.53 U3.60 | length 8315.1
  Top Layer w10: v1(324,876) J1.31@324,1040 J1.30@324,1140 J1.29@324,1240 394,1240 v1(433,1201) ; v1@388,2533 J2.3@388,2598 J2.4@388,2698 ; U3.60@924.02,1656.83 v4@994.41,1656.83 ; U3.53@924.02,1794.63 v4@994.41,1794.63 ; U3.4@1054.93,1506.24 v4@1054.93,1576.31 ; v4@1074.61,1874.83 U3.44@1074.61,1945.22 ; U3.10@1173.04,1506.24 v6@1173.04,1575.26 ; 1212.41,1884.83 U3.37@1212.41,1945.22 ; v2(1222.51,1874.73) 1232.09,1884.31 U3.36@1232.09,1945.22 ; U3.13@1232.09,1506.24 v6@1232.09,1576.31 ; 1271.46,1885.68 U3.34@1271.46,1945.22 ; v4@1293.35,1715.89 U3.24@1363,1715.89 ; v6@1311.51,1814.31 U3.29@1363,1814.31 ; v2(1347.5,2680.72) 1347.5,2654.73 1350.5,2651.73 D4.-@1352.63,2651.73 D4.-@1352.63,2654.83 ; 1401.68,2703.88 1431.36,2703.88 ; U1.1@1677.06,2509.73 v3@1745.51,2509.73 ; C3.1@1857.5,2203.57 C3.1@1871.66,2217.73 ; P1.B4@1915.35,137.8 1915.35,284.89 ; J6.9@2101.28,2463.27 2101.28,2410.95 2109.5,2402.72 v2(2129.5,2402.72) ; J6.8@2151.28,2463.27 2151.28,2428.72 2179.5,2400.5 v2(2179.5,2398.72) ; v2(2234.5,2402.72) 2251.28,2402.72 J6.6@2251.28,2463.27
  Top Layer w11: v1(469,838) J5.5@533,838 ; J5.5@537,834 J5.6@637,834 J5.7@737,834 J5.8@837,834 837,912 v1(904,979) ; C11.1@1100.51,2113.29 1100.51,2146.73 v4(1108.51,2154.73) ; v2@1261.87,1873.37 U3.32@1363,1873.37 ; D4.-@1352.51,2651.85 FB1.1@1352.51,2718.73 ; v3(1746.23,1475.17) 1771.23,1475.17 ; v2(1756,833) 1844.98,833 1897.49,885.51 ; U2.6@1817.71,1463 1783.39,1463 1771.23,1475.17 ; U2.5@1817.71,1488.59 1784.65,1488.59 1771.23,1475.17 ; D1.-@1846.39,885.51 1897.49,885.51 ; D2.-@1846.39,955.51 1897.49,904.41 ; D3.-@1846.39,1026.51 1897.49,975.41 1897.49,904.41 ; SW1.4@2390,863.27 2390,911 2407,928 v1(2614,928) ; v3@2392.24,1374.46 T1.2@2392.24,1428.86 v3@2392.24,1482.46 ; D5.-@2526.51,2346.85 2544.15,2346.85 v1(2627,2264) ; J3.7@2704.71,2615.75 2729,2591.46 ; v3(2729,2537) 2729,2591.46 ; J3.8@2754.71,2615.75 2730.42,2591.46 2729,2591.46 ; 1897.49,885.51 1897.49,904.41
  Top Layer w11.1: v4(1159.51,1872.73) 1173.04,1886.26 U3.39@1173.04,1945.22
  Top Layer w15: v3@983.95,2547.17 J7.5@983.95,2633.23
  Top Layer w17.79: C7.2@2136.61,1420.68 v3@2173.74,1420.68 ; R16.1@2265.51,1355.73 v3@2292.51,1355.73
  Top Layer w25: v4(733.51,1666.73) C10.1@771.95,1666.73 ; v4(752.51,1783.73) C19.1@789.95,1783.73 ; v2@884.51,1961.73 R18.1@917.98,1961.73 ; v2(1029.51,1327.73) C14.1@1029.51,1360.17 ; v2(1106.51,1318.73) C15.1@1106.51,1356.17 ; v2(1153.51,1318.73) C16.1@1153.51,1356.17 ; v2(1212.51,1324.73) C12.1@1212.51,1356.17 ; C22.1@1237.51,2064.73 1237.51,2051.29 1247.07,2041.73 v4(1268.51,2041.73) ; C18.1@1238.07,2009.73 v4@1267.51,2009.73 ; v4(1268.51,2009.73) v4@1267.51,2009.73 ; v4@1268.51,2010.73 v4@1267.51,2009.73 ; FB1.1@1352.51,2718.73 v3@1416.51,2718.73 ; 1431.36,2703.88 C2.1@1495.51,2703.88 ; C17.1@1514.07,1681.73 v1(1551.51,1681.73) ; v3(1853.51,2517.73) 1853.51,2508.17 C1.1@1896.95,2464.73 ; C3.1@1871.66,2217.73 1903.51,2217.73 v3(1924.51,2238.73) ; C3.1@1903.51,2209.73 v3(1924.51,2188.73) ; 1915.35,284.89 2033.46,403 ; v3(2012,427) 2012,424.46 2033.46,403 ; P1.B7@2033.46,137.8 2033.46,403 ; P1.B13@2348.43,137.8 2348.43,321.57 2267,403 ; P1.B16@2466.54,137.8 2466.54,258.46 2322,403 ; P1.B18@2545.28,137.8 2545.28,260.72 2403,403 2322,403 ; 2033.46,403 2267,403 ; 2267,403 2322,403
  Bottom Layer w25: P1.A4@1915.35,137.8 1915.35,332.35 v3@2010,427 ; v3(2012,427) 2242,427 ; P1.A12@2309.06,137.8 2309.06,359.94 2242,427 ; P1.A15@2427.17,137.8 2427.17,355.83 2356,427 ; P1.A18@2545.28,137.8 2545.28,358.72 2477,427 2356,427 ; 2242,427 2356,427
  other v1: 1067,1144 1189,1144 1286,1144 729.51,1154.73 945.51,1162.73 817.51,1182.73 1616,1188 1691,1194 1336.51,1237.73 1746.51,1256.73 1601.51,1292.73 841.51,1318.73 710.51,1320.73 945.51,1320.73 1350.51,1399.73 720.51,1402.73 1608.51,1402.73 935.51,1403.73 844.51,1404.73 1703.51,1439.73 942.51,1472.73 718.51,1512.73 1362.51,1513.73 792.51,1517.73 876.51,1527.73 1742.51,1533.73 1613.51,1546.73 1296.51,1591.73 997.51,1616.73 1209.51,1616.73 1290.51,1629.73 1782,1642 1149.51,1658.73 1067.51,1693.73 1620.51,1694.73 1220.51,1713.73 1773,1724 1075.51,1744.73 1151.51,1751.73 1284.51,1797.73 1603.51,1841.73 1238.51,1842.73 1731.51,1843.73 1439.51,1900.73 1440.51,1956.73 1322.51,1972.73 673.51,1974.73 1732.51,1978.73 1590.51,1992.73 1318.51,2028.73 923.51,2066.73 1142.51,2121.73 839.51,2132.73 672.51,2142.73 944.51,2144.73 1319.51,2167.73 1138.51,2191.73 950.51,2253.73 1129.51,2301.73 1123.51,2450.73 385,2530
  other v2: 1511.51,1723.73 1260.51,1874.73 883.51,1960.73
  other v3: 2005.23,1277.17 2085.23,1277.17 2302.51,1365.73 2384.51,1366.73 2464.51,1366.73 2174.23,1421.17 2392.51,1482.73 2005.23,1621.17 2085.23,1621.17 977.51,2458.73 1753.51,2517.73 978.51,2541.73 1802.51,2567.73 1417.51,2719.73
  other v4: 1054.51,1576.73 994.51,1656.73 1292.51,1716.73 994.51,1794.73 1074.51,1874.73 1491.51,1961.73 1523.51,1961.73
  other v5: 2434,627 167,685 3046,2644 150,2651
  other v6: 1174.51,1576.73 1232.51,1576.73 1311.51,1813.73
JTAG1: P1.B9
JTAG2: P1.A5
JTAG3: P1.A6
JTAG4: P1.A7
JTAG5: P1.A8
NetC4_2: C4.2 C5.2 C8.2 C9.2 R17.2 U2.1 U2.4 | length 901.6
  Top Layer w10: U2.1@1987,1411.82 2009.57,1411.82 2014.23,1407.17 ; U2.4@1987,1488.59 2009.65,1488.59 2014.23,1493.17
  Top Layer w25: 2014.23,1407.17 2019.88,1401.51 2019.88,1370.08 C8.2@2020.46,1369.5 C9.2@2069.68,1369.5 2118.9,1369.5 2118.9,1366.92 2145.23,1340.59 v3(2145.23,1305.17) ; 2014.23,1493.17 2020.46,1499.4 C5.2@2020.46,1530.91 C4.2@2069.68,1530.91 2109.98,1530.91 v3(2141.23,1562.17) ; v3@2142,1562.94 R17.2@2142,1741.13
  Bottom Layer w25: v3(2141.23,1562.17) 2118.9,1539.84 2118.9,1369.5 2145.23,1343.17 v3(2145.23,1305.17)
NetC6_1: C6.1 U2.3 | length 101.4
  Top Layer w17.79: U2.3@1987,1463 2064.76,1463 C6.1@2081.49,1479.73
NetC7_1: C7.1 U2.2 | length 101.4
  Top Layer w17.79: U2.2@1987,1437.41 2064.76,1437.41 C7.1@2081.49,1420.68
NetC20_1: C20.1 U3.30 Y1.2 | length 279
  Top Layer w10: U3.30@1363,1834 1397.78,1834 1399.51,1835.73 1549.84,1835.73 1551.57,1834 Y1.2@1614.51,1771.06
NetC21_2: C21.2 U3.31 Y1.1 | length 431.2
  Top Layer w10: U3.31@1363,1853.68 1551.46,1853.68 Y1.1@1614.51,1916.73 1551.5,1853.72 1507.5,1853.72 C21.2@1507.51,1874.17
NetD1_+: D1.+ R7.1 | length 66.5
  Top Layer w11: R7.1@1724.8,885.51 D1.+@1791.27,885.51
NetD2_+: D2.+ R8.1 | length 66.9
  Top Layer w11: R8.1@1724.8,956.51 1790.27,956.51 D2.+@1791.27,955.51
NetD3_+: D3.+ R9.1 | length 66.9
  Top Layer w11: R9.1@1724.8,1025.51 1790.27,1025.51 D3.+@1791.27,1026.51
NetD4_+: D4.+ R10.1 | length 77.7
  Top Layer w11: R10.1@1290.98,2576.73 1290.98,2645.2 D4.+@1297.51,2651.73
NetD5_+: D5.+ R12.1 | length 60.5
  Top Layer w11: R12.1@2467.51,2288.2 2522.98,2288.2 D5.+@2526.51,2291.73
NetFB1_2: FB1.2 J7.G1 J7.G2 | length 628.8
  Top Layer w20: v1(806.62,2733.62) J7.G2@877.65,2733.62 ; J7.G1@1192.61,2733.62 v2(1253.4,2733.62) 1282.5,2733.62 FB1.2@1297.39,2718.73
  Bottom Layer w20: v1(806.62,2733.62) v2(1253.4,2733.62)
NetFB2_2: FB2.2 J7.1 | length 205.2
  Top Layer w15.75: J7.1@1086.31,2633.23 1086.31,2603.94 1125.51,2564.73 1125.51,2511.73 1141.51,2495.73 FB2.2@1186.39,2495.73
NetJ8_2: J8.2 R15.2 | length 788.3
  Top Layer w17.79: R15.2@2303.51,1702.6 2703.92,2103 J8.2@2926,2103
NetJ9_2: J9.2 J12.2 | length 1829
  Top Layer w17.79: J12.2@1102,763 J9.2@2931,763
NetJ10_2: J10.2 T1.4 | length 558.9
  Top Layer w17.79: T1.4@2442.24,1303.66 2442.24,1240.24 2470.47,1212 J10.2@2926,1212
NetJ11_2: J11.2 T1.3 | length 678.9
  Top Layer w17.79: T1.3@2442.24,1428.86 2442.24,1603.24 2490,1651 J11.2@2927,1651
NetR13_2: R13.2 SW1.1 | length 726.4
  Top Layer w11: v1(1875,1228) 1951,1152 1951,1121.17 SW1.1@2032,1040.17
  Bottom Layer w11: R13.2@1643,1605.47 1643,1460 v1(1875,1228)
NetR14_1: R14.1 R15.1 T1.1 | length 218.5
  Top Layer w17.79: R14.1@2302.87,1559.57 2342.24,1520.2 T1.1@2342.24,1428.86 ; R14.1@2303.51,1560.21 R15.1@2303.51,1631.73
NetR16_2: R16.2 T1.6 | length 105.9
  Top Layer w10: R16.2@2256.51,1283.87 2265.51,1283.87 R16.2@2265.51,1284.87 ; T1.6@2342.24,1303.66 2342.24,1300.72 2342.51,1300.45 T1.6@2342.51,1284.87
  Top Layer w17.79: R16.2@2265.51,1284.87 T1.6@2342.51,1284.87
NetR18_2: R18.2 U3.48 | length 25.7
  Top Layer w10: R18.2@977.04,1961.73 993.55,1945.22 U3.48@995.87,1945.22